# Altium PCB Preamp.PcbDoc
Units mm, origin at the board's own origin, x right, y up, seen from the top; angles counter-clockwise.
Board outline 48 x 24 mm, 2 copper layers (Top Layer, Bottom Layer), stack 1.671 mm thick; 29 components, 16 nets, 70 pads, 16 vias.
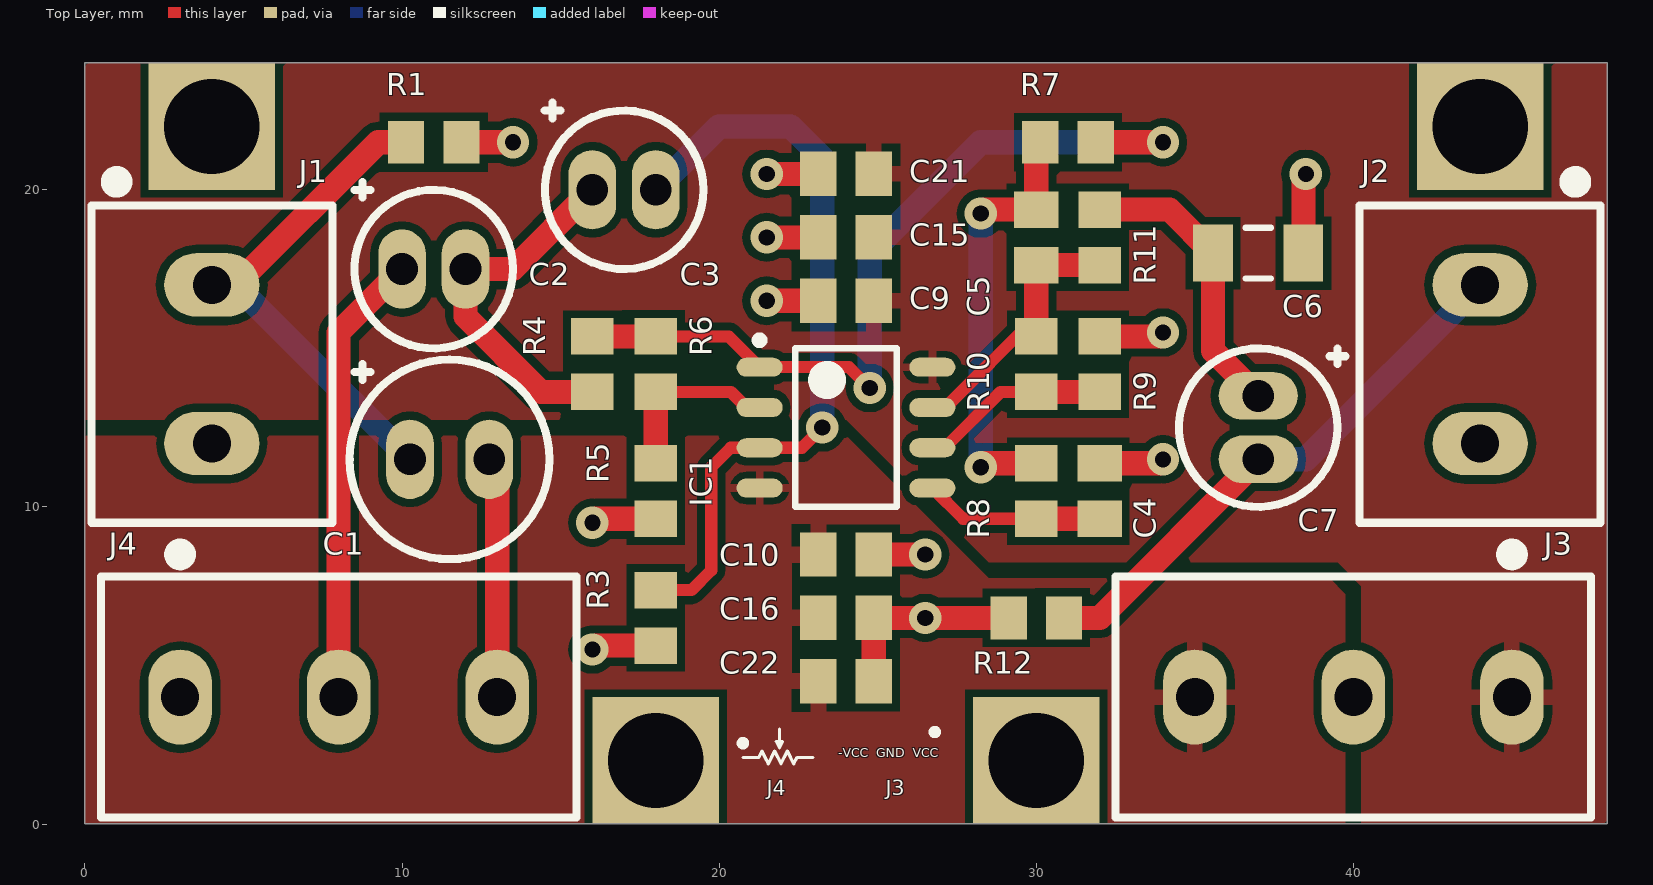
[diagram p0: Top Layer view]
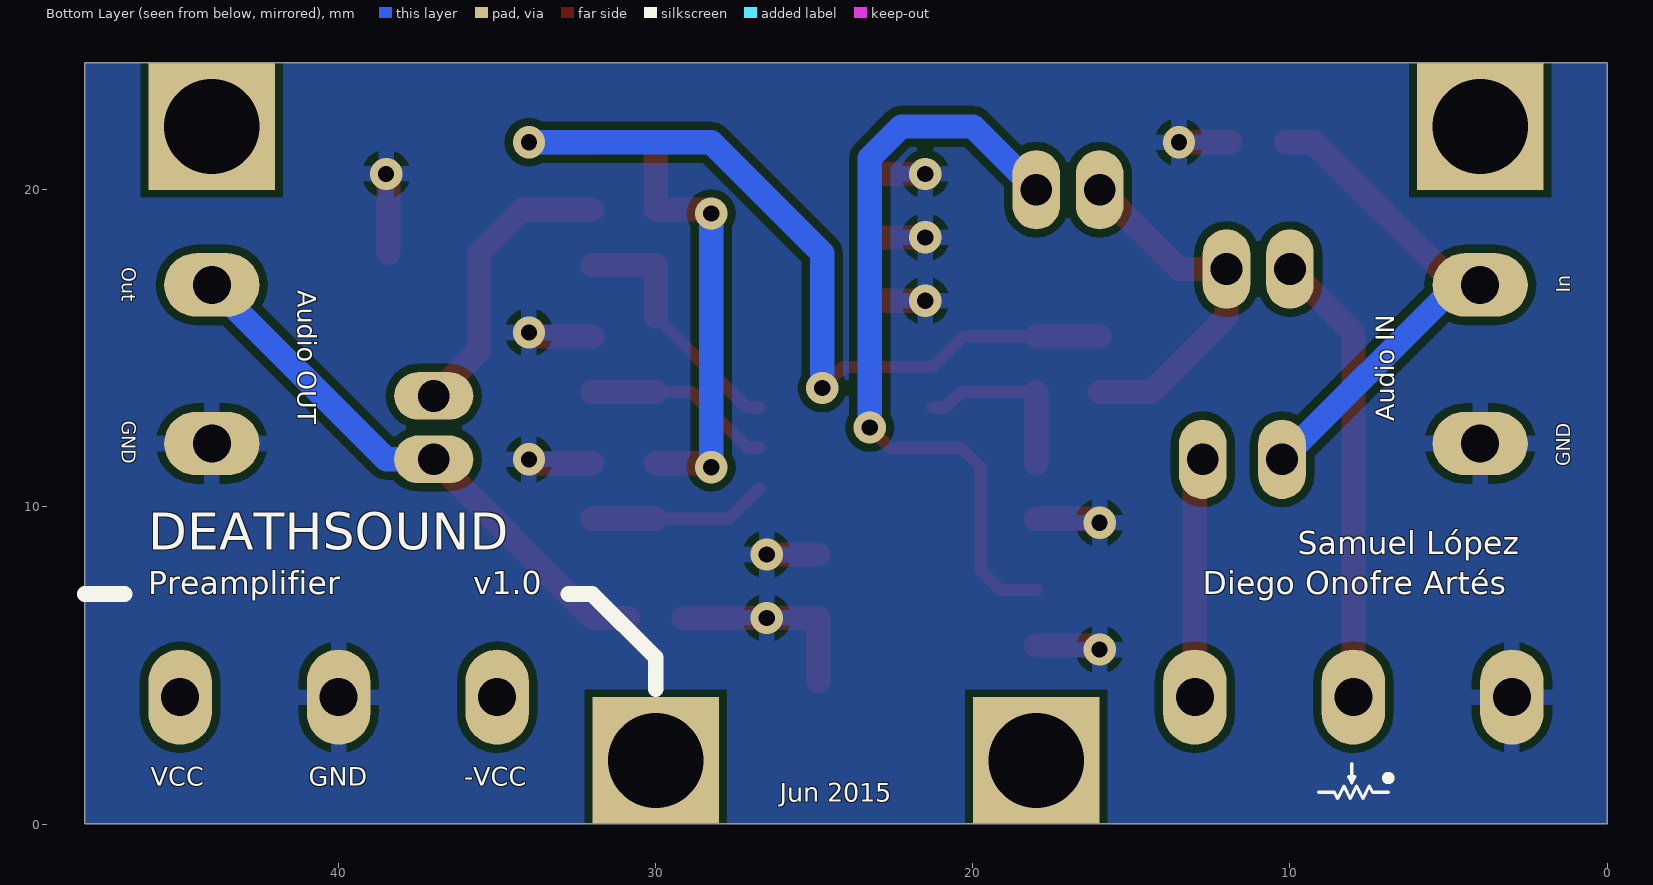
[diagram p1: Bottom Layer view, seen from below]

## Layer stack, top to bottom
Top Solder: solder mask 0.0102, Solder Resist, Dk 3.5
Top Layer: signal copper 0.0356
Dielectric 1: dielectric 1.6, FR-4, Dk 4.8
Bottom Layer: signal copper 0.0356
Bottom Solder: solder mask 0.0102, Solder Resist, Dk 3.5

## Board outline
0,0 0,24 48,24 48,0

## Design rules (kind name [scope] priority, off if disabled: settings)
Clearance [All] p1: gap=0.254
ComponentClearance ComponentClearanceHS [HasFootprint('MC33289') vs HasFootprint('TO-220')] p1: gap=0 collisioncheckmode=3 verticalgap=0 showdistances=FALSE
ComponentClearance [All] p2: gap=0.1 collisioncheckmode=3 verticalgap=0.254 showdistances=TRUE
HoleSize [All] p1: absolutevalues=TRUE maxlimit=5 minlimit=0.025 maxpercent=80.000 minpercent=20.000
MinimumSolderMaskSliver [All] p1: minsoldermaskwidth=0.203
PlaneConnect [All] p1: planeconnectstyle=Relief reliefexpansion=0.508 reliefentries=4 reliefconductorwidth=0.508 reliefairgap=0.254
PolygonConnect PolygonConnectSMD [((InNet('VCC') OR InNet('-VCC')) AND InComponent('IC1'))] p1: connectstyle=Relief reliefconductorwidth=0.254 reliefentries=4 polygonreliefangle="90 Angle" airgapwidth=0.203
PolygonConnect [All] p2: connectstyle=Relief reliefconductorwidth=0.508 reliefentries=4 polygonreliefangle="90 Angle" airgapwidth=0.254
RoomDefinition Preamp [InComponentClass('Preamp')] p1: confinementstyle=ConfineIn formatcopy=TRUE lockcomponents=FALSE outline 0,0 48,0 48,24 0,24
RoutingVias [All] p1: holewidth=0.508 width=1.016 viastyle="Through Hole" minholewidth=0.305 minwidth=0.508 maxholewidth=3.048 maxwidth=1.524
SilkToSilkClearance [All] p1: silktosilkclearance=0.127
SolderMaskExpansion [All] p1: expansion=0.102
Width [All] p1: maxlimit=2.54 minlimit=0.254 preferedwidth=0.508
25 further rules are at their usual default settings.

## Components (designator, comment, footprint, x,y, rotation, side; value= is the part's Value field where it differs from the comment)
C1 "68u" CRADIAL-2.5MM 11.5,11.5 r0 top
C2 "4.7u" CRADIAL-2MM 11,17.5 r0 top
C3 "2.2u" CRADIAL-2MM 17,20 r0 top
C4 "4.7n" C0805 32,10.5 r270 top
C5 "2.2n" C0805 30,18.5 r90 top
C6 "47n" C1206 37,18 r180 top
C7 "4.7u" CRADIAL-2MM 37,12.5 r270 top
C9 "100p" C0805 24,16.5 r0 top
C10 "100p" C0805 24,8.5 r0 top
C15 "10n" C0805 24,18.5 r0 top
C16 "10n" C0805 24,6.5 r0 top
C21 "1u" C0805 24,20.5 r0 top
C22 "1u" C0805 24,4.5 r0 top
IC1 "TL082" SOIC127P600X175-8N 24,12.5 r0 top
J1 "Audio In" "2 PIN 5MM TERMINAL BLOCK" 4,14.5 r270 top
J2 "Audio Out" "2 PIN 5MM TERMINAL BLOCK" 44,14.5 r90 top
J3 "Power Supply" "3 PIN 5MM TERMINAL BLOCK" 40,4 r0 top
J4 "100K Log" "3 PIN 5MM TERMINAL BLOCK" 8,4 r0 top
R1 "1M" R0805 11,21.5 r180 top
R3 "1.3K" R0805 18,6.5 r90 top
R4 "2.7K" R0805 16,14.5 r270 top
R5 "1K" R0805 18,10.5 r270 top
R6 "2K" R0805 18,14.5 r270 top
R7 "1.3K" R0805 31,21.5 r180 top
R8 "2.7K" R0805 30,10.5 r270 top
R9 "1.3K" R0805 32,14.5 r270 top
R10 "3.9K" R0805 30,14.5 r90 top
R11 "100" R0805 32,18.5 r270 top
R12 "100K" R0805 30,6.5 r180 top (schematic designator R[12])

## Footprints (in the part's own frame and the unit in brackets; to place one, negate y for a bottom-side part, rotate by r counter-clockwise, add the part's x,y. Pads: shape width x height; smd on the part's side, far side on the other; paste and mask are expansions set on the pad)
"2 PIN 5MM TERMINAL BLOCK" [mm]
  oval 2x3 hole 1.2: 1(-2.5,0) 2(2.5,0)
  silkscreen extent -6,-3.8 5,3.8, body extent -5,-3.8 5,3.8, height 10
"3 PIN 5MM TERMINAL BLOCK" [mm]
  oval 2x3 hole 1.2: 1(-5,0) 2(0,0) 3(5,0)
  silkscreen extent -7.5,-3.8 7.5,4.75, body extent -7.5,-3.8 7.5,3.8, height 10
C0805 [mm] "Chip Capacitor, 2-Leads, Body 2,00x1,25mm, IPC Medium Density"
  rect 1.15x1.4 smd: 1(-0.875,0) 2(0.875,0)
  body extent -1.1,-0.67 1.1,0.67, height 0.7
C1206 [mm] "Chip Capacitor, 2-Leads, Body 3,20x1,60mm, IPC Medium Density"
  rect 1.25x1.8 smd: 1(-1.425,0) 2(1.425,0)
  silkscreen extent -0.4,-0.8 0.4,0.8, body extent -1.7,-0.9 1.7,0.9, height 0.7
CRADIAL-2.5MM [mm]
  oval 1.5x2.5 hole 1: 1(-1.25,0) 2(1.25,0)
  silkscreen extent -3.15,-3.15 3.15,3.15, body extent -3.14,-3.15 3.15,3.15, height 12
CRADIAL-2MM [mm]
  oval 1.5x2.5 hole 1: 1(-1,0) 2(1,0)
  silkscreen extent -2.5,-2.5 2.5,2.75, body extent -2.49,-2.5 2.5,2.5, height 12
R0805 [mm] "Chip Resistor, 2-Leads, Body 2,00x1,25mm, IPC Medium Density"
  rect 1.15x1.35 smd: 1(-0.875,0) 2(0.875,0)
  body extent -1.1,-0.67 1.1,0.67, height 0.7
SOIC127P600X175-8N [mm] "SOIC, 8-Leads, Body 4,90x3,90mm, Pitch 1,27mm, IPC Medium Density"
  oval 1.45x0.6 smd: 1(-2.725,1.905) 2(-2.725,0.635) 3(-2.725,-0.635) 4(-2.725,-1.905) 5(2.725,-1.905) 6(2.725,-0.635) 7(2.725,0.635) 8(2.725,1.905)
  silkscreen extent -2.85,-2.5 1.6,2.88, body extent -2,-2.5 2,2.5, height 1.75

## Part data
C1 C2 C3 C7: library part "Pol Capacitor", "Polarized Capacitor"
C4 C5 C6 C9 C10 C15 C16 C21 C22: library part Capacitor, "Capacitor"
J1 J2: library part "Terminal Block 2 Pin", "Terminal Block, 2 Pin"
J3 J4: library part "Terminal Block 3 Pin", "Terminal Block, 3 Pin"
R1 R3 R4 R5 R6 R7 R8 R9 R10 R11 R12: library part Resistor, "Resistor"

## Free pads (board coordinates)
  rect 4x4 hole 3: ""(4,22) ""(18,2) ""(30,2) ""(44,22)

## Via types
v1: diameter 1.016, hole 0.508, Top Layer to Bottom Layer, 16 vias

## Nets (pads, with @x,y where several pads share a name; then routed paths per layer and width w, separated by ;. In a path a pad name is that pad's centre, name@x,y a point inside that pad or via, vN(x,y) a via of type N, cw(c..) or ccw(c..) an arc to the next point about the centre after c; other vN are vias at no path point)
-VCC: C10.1 C16.1 C22.1 IC1.4 J3.1
GND: C4.1 C6.1 C9.1 C10.2 C15.1 C16.2 C21.1 C22.2 J1.2 J2.1 J3.2 J4.1 R1.1 R3.1 R5.2 R9.1 R12.2 | length 25.1
  Top Layer w0.762: R1.1 v1(13.5,21.5) ; v1(16,5.5) 16.125,5.625 R3.1 ; v1(16,9.5) 16.125,9.625 R5.2 ; v1(21.5,16.5) C9.1 ; v1(21.5,18.5) C15.1 ; v1(21.5,20.5) C21.1 ; C22.2 C16.2 v1(26.5,6.5) R12.2 ; C10.2 v1(26.5,8.5) ; C4.1 33.875,11.375 v1(34,11.5) ; R9.1 33.875,15.375 v1(34,15.5) ; C6.1 38.425,20.425 v1(38.5,20.5)
NetC1_1: C1.1 J1.1 R1.2 | length 15.8
  Top Layer w0.762: J1.1 4.75,17 9.25,21.5 R1.2
  Bottom Layer w0.762: J1.1@4.75,17 C1.1
NetC1_2: C1.2 J4.3 | length 7.6
  Top Layer w0.762: C1.2 13,11.25 J4.3
NetC2_1: C2.1 J4.2 | length 14.3
  Top Layer w0.762: J4.2 8,15.5 C2.1
NetC2_2: C2.2 C3.1 R4.2 | length 11.5
  Top Layer w0.762: R4.2 14.375,13.625 12,16 C2.2 13.5,17.5 C3.1
NetC3_2: C3.2 IC1.3 R3.2 | length 24.3
  Top Layer w0.381: R3.2 19.125,7.375 19.75,8 19.75,11.25 20.365,11.865 IC1.3 22.615,11.865 v1(23.25,12.5)
  Bottom Layer w0.762: C3.2 20,22 22.25,22 23.25,21 v1(23.25,12.5)
NetC4_2: C4.2 IC1.5 R8.2 | length 5.7
  Top Layer w0.381: IC1.5 27.695,9.625 R8.2
  Top Layer w0.762: R8.2 C4.2
NetC5_1: C5.1 IC1.7 R10.2 R11.2 | length 8.1
  Top Layer w0.381: IC1.7 27.135,13.135 30,16
  Top Layer w0.762: 30,16 C5.1 R11.2
NetC5_2: C5.2 R7.2 R8.1 | length 14
  Top Layer w0.381: v1(28.25,11.25) v1@28.375,11.375 ; v1(28.25,19.25) v1@28.375,19.375
  Top Layer w0.762: v1@28.375,11.375 R8.1 ; v1@28.375,19.375 C5.2 R7.2@30,21.375
  Bottom Layer w0.381: v1@28.25,19 28.5,19.25 v1(28.25,19.25)
  Bottom Layer w0.762: v1(28.25,11.25) v1@28.25,19
NetC6_2: C6.2 C7.1 R11.1 | length 9.2
  Top Layer w0.762: R11.1 34.2,19.375 C6.2 35.575,14.925 C7.1
NetC7_2: C7.2 J2.2 R12.1 | length 17.5
  Top Layer w0.762: R12.1 32,6.5 C7.2
  Bottom Layer w0.762: C7.2 38.5,11.5 J2.2
NetIC1_1: IC1.1 R4.1 R6.1 R7.1 | length 26.5
  Top Layer w0.381: R6.1 20.305,15.375 IC1.1 24.095,14.405 v1(24.75,13.75)
  Top Layer w0.762: R4.1 R6.1 ; R7.1 v1(34,21.5)
  Bottom Layer w0.762: v1(24.75,13.75) 24.75,18 28.25,21.5 v1(34,21.5)
NetIC1_2: IC1.2 R5.1 R6.2 | length 5.7
  Top Layer w0.381: R6.2 20.375,13.625 20.865,13.135 IC1.2
  Top Layer w0.762: R5.1 R6.2
NetIC1_6: IC1.6 R9.2 R10.1 | length 6
  Top Layer w0.381: IC1.6 27.115,11.865 28.875,13.625 R10.1
  Top Layer w0.762: R10.1 R9.2
VCC: C9.2 C15.2 C21.2 IC1.8 J3.3

## Polygon pours and split planes (outlines as drawn)
GND on Bottom Layer "GND" (solid, pour order 5): 0,0 0,24 48,24 48,0
VCC on Top Layer "VCC" (solid, pour order 4): 40.25,0 48,0 48,24 0,24 0,12.75 24,12.75 28.5,8.25 39.5,8.25 40.25,7.5
-VCC on Top Layer "-VCC" (solid, pour order 6): 39.75,0 39.75,7.25 39.25,7.75 28.5,7.75 24,12.25 0,12.25 0,0

## Silkscreen, mask and mechanical layers (free items; w line width, h text height)
Top Overlay:
  circle w0.25: c26.8,2.9 r0.071
  circle w0.25: c20.75,2.55 r0.071
  lines w0.1: 20.75,2.1 21.25,2.1 21.35,2.3 21.45,2.1 21.55,1.9 21.65,2.1 21.75,2.3 21.85,2.1 21.95,1.9 22.05,2.1 22.15,2.3 22.35,1.9 22.45,2.1 22.95,2.1 ; 21.9,3 21.9,2.6 21.9,2.4 ; 21.9,2.4 22,2.6 21.8,2.6 21.9,2.4
  text "-VCC  GND  VCC" at 23.75,2 h0.5
  text "J4" at 21.5,0.75 h0.8
  text "J3" at 25.25,0.75 h0.8
Bottom Overlay:
  circle w0.25: c6.9,1.45 r0.071
  lines w0.1: 6.9,1 7.4,1 7.5,1.2 7.6,1 7.7,0.8 7.8,1 7.9,1.2 8,1 8.1,0.8 8.2,1 8.3,1.2 8.5,0.8 8.6,1 9.1,1 ; 8.05,1.9 8.05,1.5 8.05,1.3 ; 8.05,1.3 8.15,1.5 7.95,1.5 8.05,1.3
  lines w0.5: 30,4.25 30,5.25 32,7.25 32.75,7.25 ; 46.75,7.25 47,7.25 48,7.25
  text "Out" at 47,17.559 h0.75 r90
  text "Audio OUT" at 41.5,16.825 h1 r90
  text "In" at 1,16.748 h0.75 r270
  text "Audio IN" at 6.5,12.698 h1 r270
  text "GND" at 47,12.712 h0.75 r90
  text "GND" at 1,11.288 h0.75 r270
  text "Samuel López" at 9.757,8.25 h1.25
  text "DEATHSOUND" at 46,8.25 h2
  text "Diego Onofre Artés" at 12.75,7 h1.25
  text "v1.0" at 35.754,7 h1.25
  text "Preamplifier" at 46,7 h1.25
  text "-VCC" at 36.045,1 h1
  text "GND" at 40.95,1 h1
  text "VCC" at 45.921,1 h1
  text "Jun 2015" at 26.087,0.5 h1
Mechanical 1:
  lines w0.25: 48,0 0,0 0,24 48,24 48,0 ; 48,0 48,0

## Dimensions
0,0 to 0,24 on Mechanical 13
0,24 to 48,24 on Mechanical 13